# Altium PCB PSRR.PcbDoc
Units mm, origin at the board's own origin, x right, y up, seen from the top; angles counter-clockwise.
Board outline 25 x 25 mm, 2 copper layers (Top Layer, Bottom Layer), stack 0.266 mm thick; 59 components, 22 nets, 160 pads, 11 vias.
Unrouted connection lines stored in the file: 47.
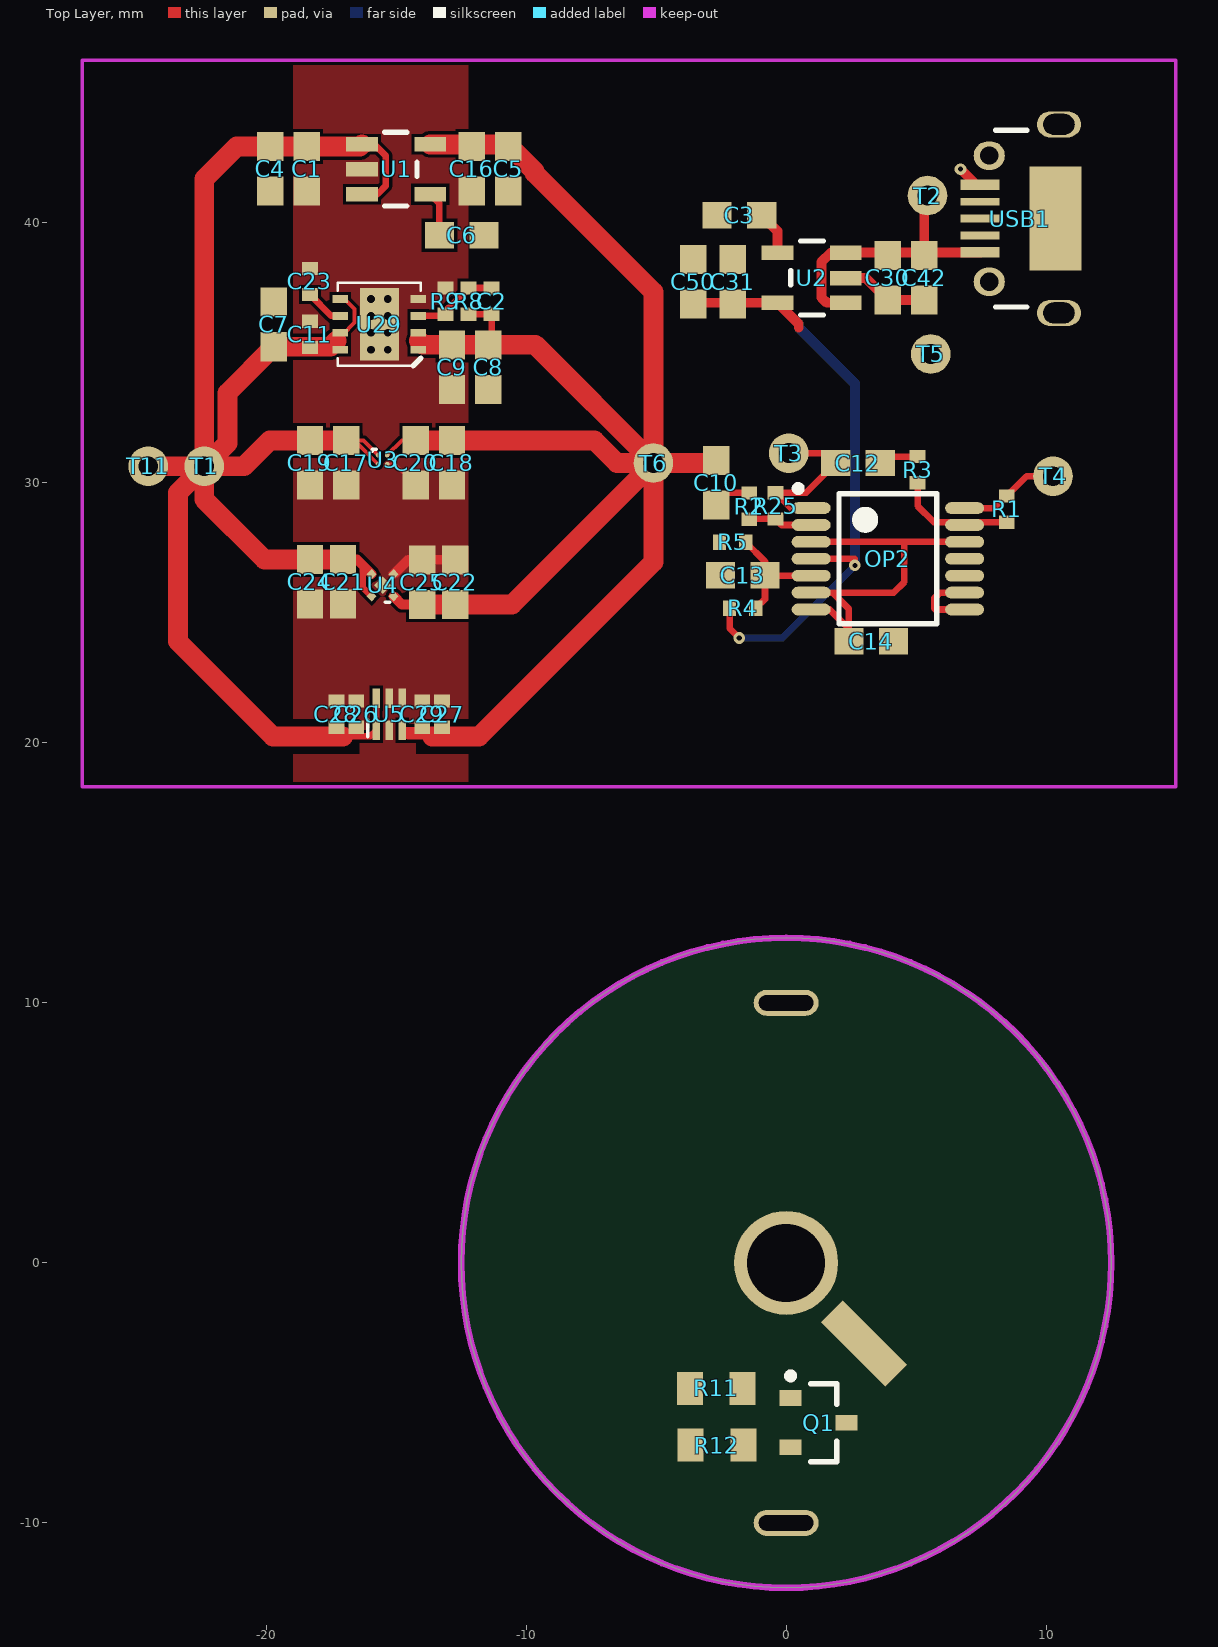
[diagram p0: Top Layer view]
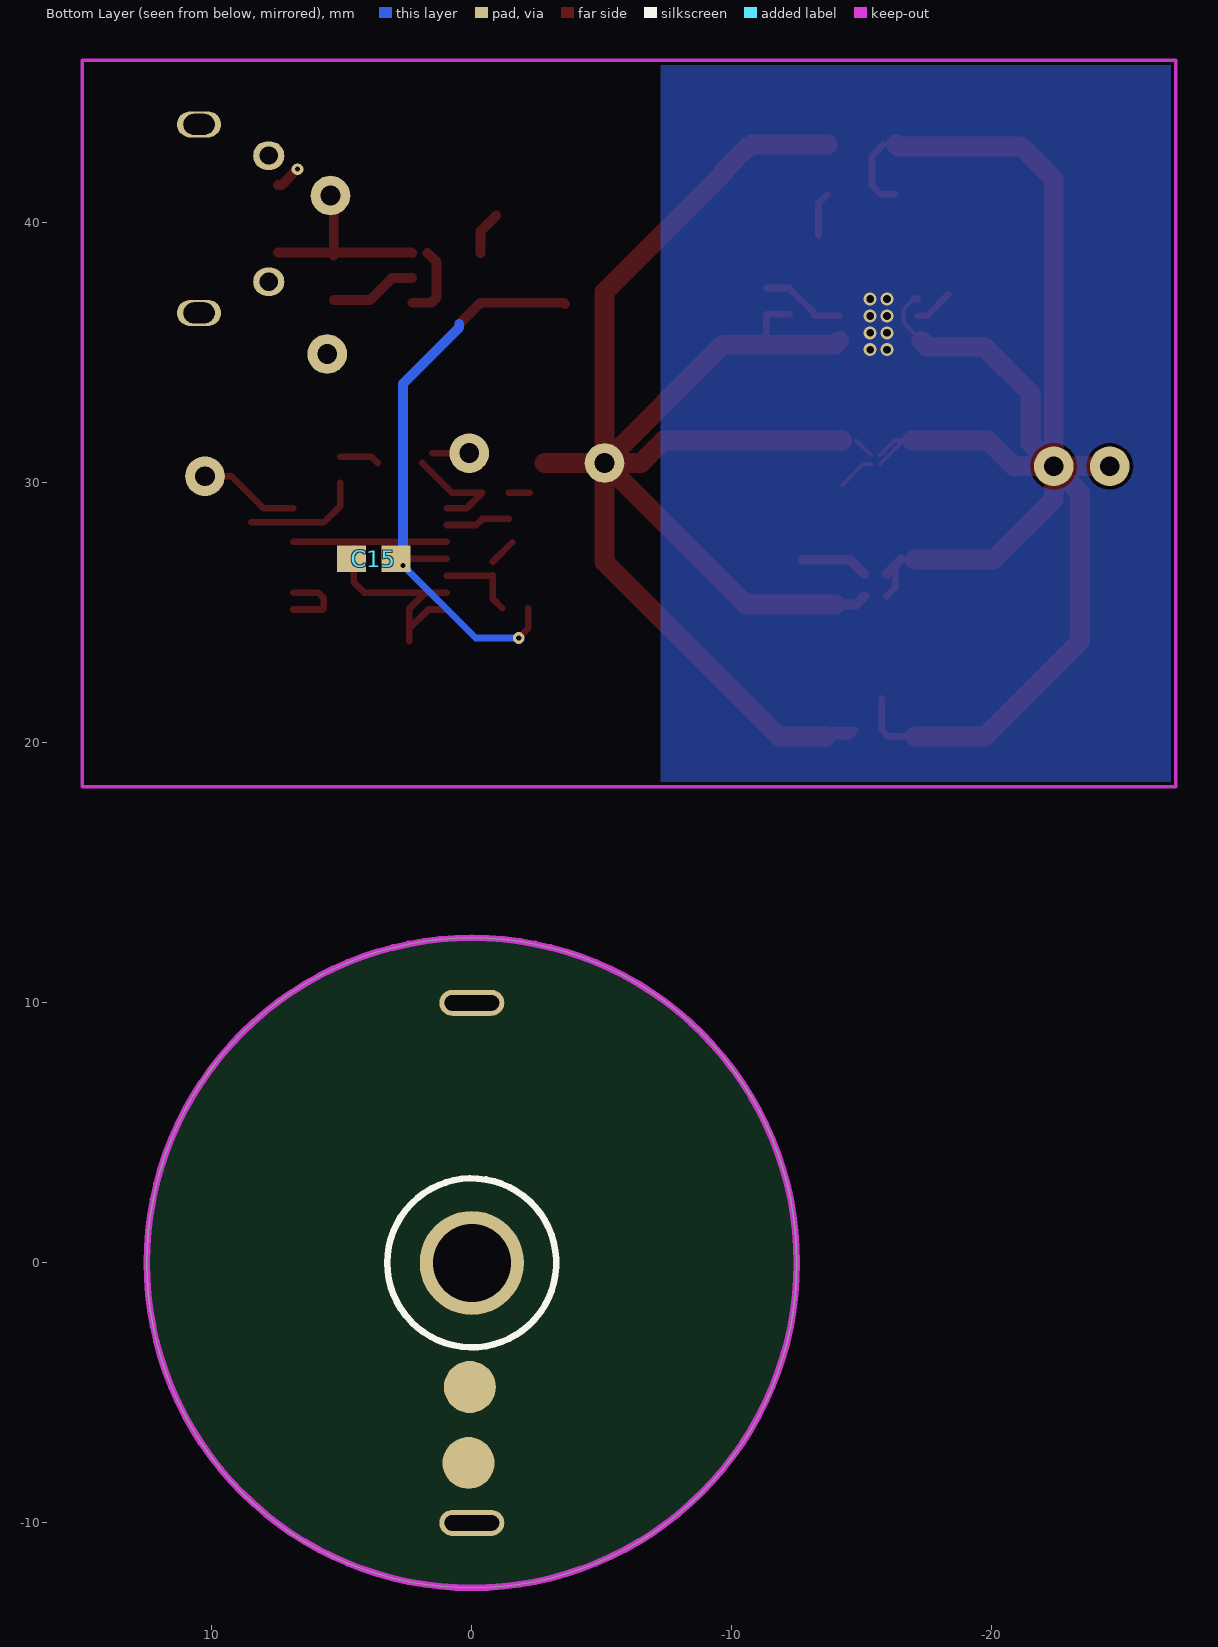
[diagram p1: Bottom Layer view, seen from below]

## Layer stack, top to bottom
Top Solder: solder mask 0.0102, Solder Resist, Dk 3.5
Top Layer: signal copper 0.0356
Dielectric1: core 0.195, FR-4, Dk 4.2
Bottom Layer: signal copper 0.0356
Bottom Solder: solder mask 0.0102, Solder Resist, Dk 3.5

## Board outline
0,-12.5 cw(c0,0) -12.5,0 cw(c0,0) 0,12.5 cw(c0,0) 12.5,0 cw(c0,0)

## Design rules (kind name [scope] priority, off if disabled: settings)
Clearance Clearance_1 [InNetClass('50R') vs InPolygon] p1: gap=0.508 ignorepadtopadclearanceinfootprint=FALSE except(0: Arc-Hole Track-Hole SMDPad-Hole THPad-Hole Via-Hole Fill-Hole Poly-Hole Region-Hole Text-Hole)
Clearance [All] p2: gap=0.102 ignorepadtopadclearanceinfootprint=FALSE
DiffPairsRouting [All] p1: maxlimit=0.254 minlimit=0.152 mostfreqgap=0.152 toplayer_minwidth=0.152 toplayer_maxwidth=0.381 toplayer_prefwidth=0.152 bottomlayer_minwidth=0.152 bottomlayer_maxwidth=0.381 bottomlayer_prefwidth=0.152 maxuncoupledlength=12.7
FanoutControl Fanout_Default [All] p5: bgadir=Out bgaviamode=Closest fanoutstyle=Auto fanoutdirection=Alternating viagrid=0.025 // Fanout_Default (Default Rule)
MinimumSolderMaskSliver [All] p1 off: minsoldermaskwidth=0.254
PlaneClearance [All] p1: clearance=0.152
PlaneConnect [All] p1: planeconnectstyle=Direct reliefexpansion=0.508 reliefentries=4 reliefconductorwidth=0.254 reliefairgap=0.254
PolygonConnect [All] p1: connectstyle=Direct reliefconductorwidth=0.254 reliefentries=4 polygonreliefangle="90 Angle" airgapwidth=0.254
RoomDefinition PSRR [InComponentClass('PSRR')] p1 off: confinementstyle=ConfineIn formatcopy=TRUE lockcomponents=FALSE outline 6.295,12.093 92.401,12.093 92.401,16.614 6.295,16.614
RoutingVias [All] p1: holewidth=0.2 width=0.45 viastyle="Through Hole" minholewidth=0.2 minwidth=0.45 maxholewidth=0.508 maxwidth=1.27
SilkToSilkClearance [All] p1 off: silktosilkclearance=0.254
SilkToSolderMaskClearance [IsPad] p1 off: minsilkscreentomaskgap=0.254 clearancetoexposedcopper=TRUE
SolderMaskExpansion [All] p1 off: expansion=0.076
Width Width_1 [InNet('3.3') or InNet('GND')] p1: maxlimit=5.08 minlimit=0.089 preferedwidth=0.089
Width [All] p2: maxlimit=2.54 minlimit=0.089 preferedwidth=0.089
23 further rules are at their usual default settings.

## Classes and differential pairs
component class PSRR: C1 C2 C3 C4 C5 C6 C7 C8 C9 C10 C11 C12 C13 C14 C15 C16 C17 C18 C19 C20 C21 C22 C23 C24 C25 C26 C27 C28 C29 C30 C31 C42 C50 OP2 R1 R2 R3 R4 R5 R8 R9 R25 T1 T2 T3 T4 T5 T6 T11 U1 U2 U3 U4 U5 U29 USB1

## Components (designator, comment, footprint, x,y, rotation, side; value= is the part's Value field where it differs from the comment)
C1 "2.2uF" 0603 -18.44,42.062 r90 top
C2 "470nF" 0402 -11.328,36.982 r90 top
C3 "4.7uF" 0603 -1.803,40.284 r0 top
C4 "4.7uF" 0603 -19.837,42.062 r90 top
C5 "4.7uF" 0603 -10.693,42.062 r90 top
C6 "4.7uF" 0603 -12.471,39.522 r180 top
C7 "2.2uF" 0603 -19.71,36.093 r270 top
C8 "0.1uF" 0603 -11.455,34.442 r90 top
C9 "2.2uF" 0603 -12.852,34.442 r90 top
C10 "4.7uF" 0603 -2.692,29.997 r90 top
C11 "0.1uF" 0402 -18.313,35.712 r270 top
C12 "4.7uF" 0603 2.769,30.759 r180 top
C13 "4.7uF" 0603 -1.676,26.441 r0 top
C14 "4.7uF" 0603 3.277,23.901 r180 top
C15 "4.7uF" 0603 3.785,27.076 r180 bottom
C16 "2.2uF" 0603 -12.09,42.062 r90 top
C17 "2.2uF" 0603 -16.916,30.759 r90 top
C18 "2.2uF" 0603 -12.852,30.759 r90 top
C19 "4.7uF" 0603 -18.313,30.759 r90 top
C20 "4.7uF" 0603 -14.249,30.759 r90 top
C21 "2.2uF" 0603 -17.043,26.187 r90 top
C22 "2.2uF" 0603 -12.725,26.187 r270 top
C23 "470nF" 0402 -18.313,37.744 r270 top
C24 "4.7uF" 0603 -18.313,26.187 r90 top
C25 "4.7uF" 0603 -13.995,26.187 r270 top
C26 "2.2uF" 0402 -16.535,21.107 r270 top
C27 "2.2uF" 0402 -13.233,21.107 r270 top
C28 "4.7uF" 0402 -17.297,21.107 r270 top
C29 "4.7uF" 0402 -13.995,21.107 r270 top
C30 "4.7uF" 0603 3.912,37.871 r90 top
C31 "4.7uF" 0603 -2.057,37.744 r270 top
C42 "4.7uF" 0603 5.309,37.871 r90 top
C50 "4.7uF" 0603 -3.581,37.744 r270 top
OP2 "MCP6024" TSSOP14_44MM_065P 3.912,27.076 r0 top
Q1 "JFET-N" SOT-23_L 1.245,-6.147 r0 top
R1 "10k" 0402 8.484,28.981 r90 top
R2 "1k" 0402 -1.422,29.108 r270 top
R3 "1k" 0402 5.055,30.505 r270 top
R4 "5k" 0402 -1.676,25.171 r0 top
R5 "5k" 0402 -2.057,27.711 r180 top
R8 "6.25k" 0402 -12.217,36.982 r90 top value=0Ohm
R9 "10k" 0402 -13.106,36.982 r90 top value=0Ohm
R11 "1k" 0805 -2.692,-4.826 r0 top
R12 "1k" 0805 -2.667,-7.01 r0 top (schematic designator R11)
R25 "10k" 0402 -0.406,29.108 r90 top
T1 "TestPad" TestPad -22.377,30.632 r180 top
T2 "TestPad" TestPad 5.436,41.046 r0 top
T3 "TestPad" TestPad 0.102,31.14 r0 top
T4 "TestPad" TestPad 10.262,30.251 r0 top
T5 "TestPad" TestPad 5.563,34.95 r0 top
T6 "TestPad" TestPad -5.105,30.759 r0 top
T11 "TestPad" TestPad -24.536,30.632 r180 top
U1 "LP5907" SOT23-5 -15.011,42.062 r270 top
U2 "LP5907" SOT23-5 0.991,37.871 r90 top
U3 "LP5907-BGA" DSBGA-4 -15.519,30.886 r0 top
U4 "LP5907-X2SON" X2SON -15.519,26.06 r180 top
U5 "TLV700xx-WSON" WSON -15.265,21.107 r90 top
U29 "TPS7A8101" TPS7A8101 -15.646,36.093 r180 top
USB1 "USB Micro Type B" MICRO-YZX 13.31,40.157 r90 top

## Footprints (in the part's own frame and the unit in brackets; to place one, negate y for a bottom-side part, rotate by r counter-clockwise, add the part's x,y. Pads: shape width x height; smd on the part's side, far side on the other; paste and mask are expansions set on the pad)
0402 [mil] "0402-RES"
  rect 20x24 smd: 1(-19.69,0) 2(20,0)
0603 [mil] "0603-RES"
  rect 44x40 smd: 1(-33.46,0) 2(34,0)
0805 [mm]
  rect 1x1.27 smd: 1(-1.016,0) 2(1.016,0)
  body extent -1.27,-0.76 1.27,0.76, height 0.8
DSBGA-4 [mm]
  round 0.18 smd: A1(-0.175,0.175) A2(0.175,0.175) B1(-0.175,-0.175) B2(0.175,-0.175)
  silkscreen extent -0.4,0.32 -0.25,0.4, body extent -0.33,-0.33 0.33,0.33, height 0.45
MICRO-YZX [mm]
  rect 0.4x1.5 smd: 1(-1.3,5.85) 5(1.3,5.85)
  rect 0.3x1.5 smd: 2(-0.65,5.85) 3(0,5.85) 4(0.65,5.85)
  oval 1x1.7 hole 0.8 slot 1.2 at 90 deg: 5(-3.625,2.82) 5(3.625,2.82)
  oval 1.1x1.2 hole 0.7: 5(-2.425,5.5) 5(2.425,5.5)
  rect 4x2 smd: 5(0,2.95)
  silkscreen extent -3.4,4.05 3.4,5.25, body extent -4.02,0.33 3.98,5.93, height 2.6
SOT23-5 [mil] "SOT23-5"
  rect 22x48 smd: 1(-37.4,-51.19) 2(0,-51.19) 3(38,-51.19) 4(38,52) 5(-37.4,52)
  silkscreen extent -56,-17 56,32
SOT-23_L [mm] "SOT23, 3-Leads, Body 2.9x1.3mm, Pitch 0.95mm, Lead Span 2.5mm, IPC High Density"
  rect 0.85x0.6 smd: 1(-1.075,0.95) 2(-1.075,-0.95) 3(1.075,0)
  silkscreen extent -1.2,-1.5 0.7,1.92, body extent -0.7,-1.5 0.7,1.5, height 1.1
TestPad [mil]
  round 60 hole 30: 1(0,0)
TPS7A8101 [mm]
  rect 1.5x2.8 smd: 0(0,0)
  rect 0.6x0.3 smd: 1(-1.5,0.975) 2(-1.5,0.325) 3(-1.5,-0.325) 4(-1.5,-0.975) 5(1.5,-0.975) 6(1.5,-0.325) 7(1.5,0.325) 8(1.5,0.975)
  silkscreen extent -1.6,-1.6 1.6,1.6, body extent -1.5,-1.5 1.5,1.5, height 0.6
TSSOP14_44MM_065P [mm]
  oval 1.5x0.45 smd: 1(-2.95,1.95) 2(-2.95,1.3) 3(-2.95,0.65) 4(-2.95,0) 5(-2.95,-0.65) 6(-2.95,-1.3) 7(-2.95,-1.95) 8(2.95,-1.95) 9(2.95,-1.3) 10(2.95,-0.65) 11(2.95,0) 12(2.95,0.65) 13(2.95,1.3) 14(2.95,1.95)
  silkscreen extent -3.57,-2.5 1.87,2.82
WSON [mm]
  rect 0.75x0.28 smd: 1(-0.625,0.5) 2(-0.625,0) 3(-0.625,-0.5) 4(0.6,-0.5) 5(0.6,0) 6(0.6,0.5)
  silkscreen extent -0.88,0.82 -0.22,0.82, body extent -0.75,-0.75 0.75,0.75, height 0.7
X2SON [mm]
  rect 0.48x0.48 smd rot 45: 0(0,0)
  rect 0.28x0.28 smd rot 45: 1(-0.425,0.425) 2(-0.425,-0.425) 3(0.425,-0.425) 4(0.425,0.425)
  silkscreen extent -0.27,0.65 -0.1,0.65, body extent -0.5,-0.5 0.5,0.5, height 0.4

## Part data
C1 C7 C8 C9 C11 C16 C17 C18 C21 C22 C23 C26 C27: library part CAP0402-CAP, "<b>Capacitor</b> / Standard 0603 ceramic capacitor, and 0.1\" leaded capacitor.", PARTNO=CC0402ZRY5V7BB104
C2 C3 C4 C5 C6 C10 C12 C13 C14 C15 C19 C20 C24 C25 C28 C29 C30 C31 C42 C50: library part Cap, "Capacitor", LatestRevisionDate=17-Jul-2002, LatestRevisionNote="Re-released for DXP Platform.", PackageDescription="Radial Cap, Thru-Hole; 2 Leads; 0.3 in Pin Spacing", PackageReference=RAD-0.3, Published=8-Jun-2000, Publisher="Altium Limited"
OP2: library part OP-SOP14
Q1: "N-Channel JFET", Code_JEDEC=TO-254-AA, LatestRevisionDate=17-Jul-2002, LatestRevisionNote="Re-released for DXP Platform.", PackageReference=TO-254-AA, Published=8-Jun-2000, Publisher="Altium Limited"
R1 R2 R3 R4 R5 R8 R9 R11 R12 R25: library part Res2, "Resistor", LatestRevisionDate=17-Jul-2002, LatestRevisionNote="Re-released for DXP Platform.", PackageDescription="Axial Device, Thru-Hole; 2 Leads; 0.4 in Pin Spacing", PackageReference=AXIAL-0.4, Published=8-Jun-2000, Publisher="Altium Limited"
USB1: library part USB_Micro_TypeB, "Connector SMD USB Micro Type B middle mount", Manufacturer 1="Molex Inc", Manufacturer Part Number 1=47491-0001, Package / Case=SMD, Supplier Part Number 1=WM17142CT-ND, SCDType=undef, Supplier 1=Digi-Key

## Free pads (board coordinates)
  oval 2.5x1 hole 0.6 slot 2.1 at 0 deg: 0(0,-10) 0(0,10)
  round 4 hole 3: 1(0,0)
  rect 1.2x3.5 smd rot 45: 1(2.997,-3.099)
  round 2 smd far side: 2(0.127,-7.696) 3(0.076,-4.775)

## Via types
v1: diameter 0.5, hole 0.3, Top Layer to Bottom Layer, 8 vias
v2: diameter 0.45, hole 0.2, Top Layer to Bottom Layer, 3 vias

## Nets (pads, with @x,y where several pads share a name; then routed paths per layer and width w, separated by ;. In a path a pad name is that pad's centre, name@x,y a point inside that pad or via, vN(x,y) a via of type N, cw(c..) or ccw(c..) an arc to the next point about the centre after c; other vN are vias at no path point)
5V: C30.2 C42.2 T2.1 U2.1 U2.3 USB1.1 | length 10.2
  Top Layer w0.381: U2.3@1.702,38.837 1.364,38.498 1.364,37.117 1.56,36.921 U2.1 ; U2.3 2.312,38.857 3.912,38.857 C42.2@5.309,38.857 ; C42.2 C42.2@5.309,38.857 ; T2.1@5.309,40.919 C42.2@5.309,38.857 ; USB1.1 C42.2@5.309,38.857
D0-15: pad.2 Q1.2 R12.1 R12.2
D16-32: 
G1: C12.2 OP2.1 pad.1 Q1.3 R25.2 T3.1 | length 5.8
  Top Layer w0.254: T3.1 C12.2@1.524,31.14 ; OP2.1 0.184,29.026 R25.2 0.762,29.616 C12.2
G2: OP2.14 R1.2 T4.1 | length 3.9
  Top Layer w0.254: OP2.14 8.021,29.026 R1.2 9.246,30.251 T4.1
GND: C1.1 C3.1 C4.1 C5.1 C6.1 C7.1 C8.1 C9.1 C11.1 C13.1 C14.1 C15.1 C16.1 C17.1 C18.1 C19.1 C20.1 C21.1 C22.1 C23.1 C24.1 C25.1 C26.1 C27.1 C28.1 C29.1 C30.1 C31.1 C42.1 C50.1 OP2.10 OP2.11 pad.0 pad.3 Q1.1 R5.2 R9.2 R11.1 R11.2 T5.1 U1.2 U2.2 U3.B2 U4.0 U4.2 U5.2 U5.4 U5.5 U29.0 U29.4 USB1.5 | length 8.4
  Top Layer w0.152: U3.B2 -15.051,30.711 C20.1
  Top Layer w0.381: U4.2 -14.542,27.037 C25.1 C22.1 ; U2.2 3.062,37.871 C30.1 C42.1 ; v2(6.706,42.062) 7.311,41.457 USB1.5@7.46,41.457
  other v1: -15.971,35.118 -15.321,35.118 -15.971,35.768 -15.321,35.768 -15.971,36.418 -15.321,36.418 -15.971,37.068 -15.321,37.068
NetC2_2: C2.2 R8.2 R9.1 U29.3 | length 3.3
  Top Layer w0.254: U29.3 -13.17,36.418 -13.17,36.482 -13.17,36.537 -13.166,36.542 -12.725,36.982 -12.696,36.982 -12.217,37.461 R8.2 C2.2
NetC3_2: C3.2 U2.4 | length 1.7
  Top Layer w0.381: C3.2 -0.33,39.675 U2.4
NetC6_2: C6.2 U1.4 | length 1.7
  Top Layer w0.254: U1.4 -13.335,40.742 C6.2
NetC10_1: C10.1 R2.1 | length 0.8
  Top Layer w0.254: C10.1@-2.231,29.608 R2.1
NetC12_1: C12.1 R3.1 | length 1.5
  Top Layer w0.254: C12.1 3.865,31.005 R3.1
NetC13_2: C13.2 OP2.5 R4.2 R5.1 | length 4.3
  Top Layer w0.254: R5.1 -0.813,26.967 ; R4.2 -0.813,25.527 C13.2 -0.798,26.426 OP2.5
NetC23_2: C23.2 U29.6 | length 1.5
  Top Layer w0.254: C23.2 -17.495,36.418 U29.6
NetOP2_2: OP2.2 R2.2 R25.1 | length 2.5
  Top Layer w0.254: R2.2 -1.414,28.608 R25.1 -0.174,28.376 OP2.2
NetOP2_8: OP2.8 OP2.9 | length 2.8
  Top Layer w0.254: OP2.8 5.735,25.126 5.69,25.171 5.69,25.552 5.914,25.776 OP2.9
NetOP2_13: OP2.13 R1.1 R3.2 | length 4.6
  Top Layer w0.254: R3.2 5.055,29.108 5.682,28.481 6.862,28.481 R1.1
PSRR_IN: C1.2 C4.2 C7.2 C11.2 C17.2 C19.2 C21.2 C24.2 C26.2 C28.2 T1.1 T11.1 U1.1 U1.3 U3.A1 U3.B1 U4.3 U4.4 U5.1 U5.6 U29.5 U29.7 U29.8 | length 68.9
  Top Layer w0.152: -17.297,35.458 -17.067,35.689 -16.6,36.156 -16.6,36.681 U29.5@-16.987,37.068 ; C17.2 C17.2@-16.606,31.623 ; U3.B1 C17.2@-16.606,31.623 ; U3.A1 -16.256,31.623 C17.2@-16.606,31.623
  Top Layer w0.254: U29.5 U29.5@-16.987,37.068 ; -17.043,20.244 -16.535,20.244 -16.004,20.244 U5.1 U5.6 ; U1.3 -15.723,41.097 -15.392,41.427 -15.392,42.57 U1.1@-15.834,43.012 ; -16.281,26.695 -16.281,25.972 U4.4
  Top Layer w0.381: -16.51,27.051 U4.3
  Top Layer w0.762: T11.1 T1.1 ; -17.297,35.458 -17.392,35.364 -17.526,35.23 -18.313,35.23 C7.2 -21.488,33.452 -21.488,31.521 T1.1 ; -17.043,20.244 -17.297,20.244 -19.736,20.244 -23.393,23.901 -23.393,29.616 T1.1 ; C21.2 C24.2 -20.066,27.051 -22.377,29.362 T1.1 ; C17.2 C19.2 -19.863,31.623 -20.853,30.632 T1.1 ; U1.1 -16.398,42.926 C1.2 C4.2 -21.133,42.926 -22.377,41.681 T1.1
PSRR_OUT: C2.1 C5.2 C8.2 C9.2 C10.2 C16.2 C18.2 C20.2 C22.2 C25.2 C27.2 C29.2 R8.1 T6.1 U1.5 U3.A2 U4.1 U5.3 U29.1 U29.2 | length 72.6
  Top Layer w0.152: U3.A2 -14.783,31.623
  Top Layer w0.254: C29.2@-13.853,20.482 -13.995,20.482 U5.3 -14.527,20.244 -13.995,20.244 -13.614,20.244 ; R8.1 C2.1 C8.2@-11.328,35.433
  Top Layer w0.381: U4.1 -14.783,25.324 C25.2
  Top Layer w0.762: C20.2 C18.2 -7.366,31.623 -6.502,30.759 T6.1 ; -14.122,35.458 -13.97,35.306 C9.2 C8.2 -9.652,35.306 T6.1 ; C25.2 C22.2 -10.541,25.324 T6.1 ; U1.5 -12.09,43.012 C5.2@-10.78,43.012 ; -13.614,20.244 -13.233,20.244 -12.344,20.244 -11.811,20.244 -5.105,26.949 T6.1 ; C5.2 -10.622,42.926 -9.677,41.982 -9.677,41.91 -5.105,37.338 T6.1 ; C10.2@-2.794,30.759 T6.1
USB: 
USB3: 
VCC: C15.2 C31.2 C50.2 OP2.4 R4.1 U2.5 | length 23.6
  Top Layer w0.254: R4.1 -2.176,24.401 v2(-1.803,24.028) ; OP2.4 2.642,27.076 v2(2.642,26.822)
  Top Layer w0.381: C50.2 -3.541,36.921 -2.057,36.921 U2.5 0.483,36.109 0.483,35.966
  Bottom Layer w0.254: v2(-1.803,24.028) -0.152,24.028 v2(2.642,26.822)
  Bottom Layer w0.381: 0.483,36.109 0.483,35.966 2.642,33.807 2.642,27.076 v2(2.642,26.822)
VREF: C14.2 OP2.3 OP2.6 OP2.7 OP2.12 | length 15.1
  Top Layer w0.254: OP2.7 1.671,25.126 C14.2@2.413,24.384 ; OP2.6 1.783,25.776 ; OP2.3 4.547,27.726 ; C14.2 C14.2@2.413,24.384 ; OP2.12 4.547,27.726 ; 1.783,25.776 2.413,25.146 C14.2@2.413,24.384 ; 1.783,25.776 4.136,25.776 4.547,26.187 4.547,27.726
pads on no net: USB1.2 USB1.3 USB1.4

## Polygon pours and split planes (outlines as drawn)
GND on Bottom Layer "Bottom Layer-No Net" (solid, remove dead copper, pour order 2): -27.076,46.253 -7.264,46.253 -7.264,18.313 -27.076,18.313
GND on Top Layer "Bottom Layer-No Net" (solid, remove dead copper, pour order 8): -18.948,18.313 -12.217,18.313 -12.217,46.253 -18.948,46.253

## Keep-outs
Keep-Out Layer:
  circle w0.254: c0,0 r12.5
  lines w0.127: -27.076,18.313 14.986,18.313 14.986,46.253 -27.076,46.253 -27.076,18.313

## Silkscreen, mask and mechanical layers (free items; w line width, h text height)
Bottom Overlay:
  circle w0.254: c0,0 r3.25